# EAGLE board OR GATE (EAGLE 6.5.0)
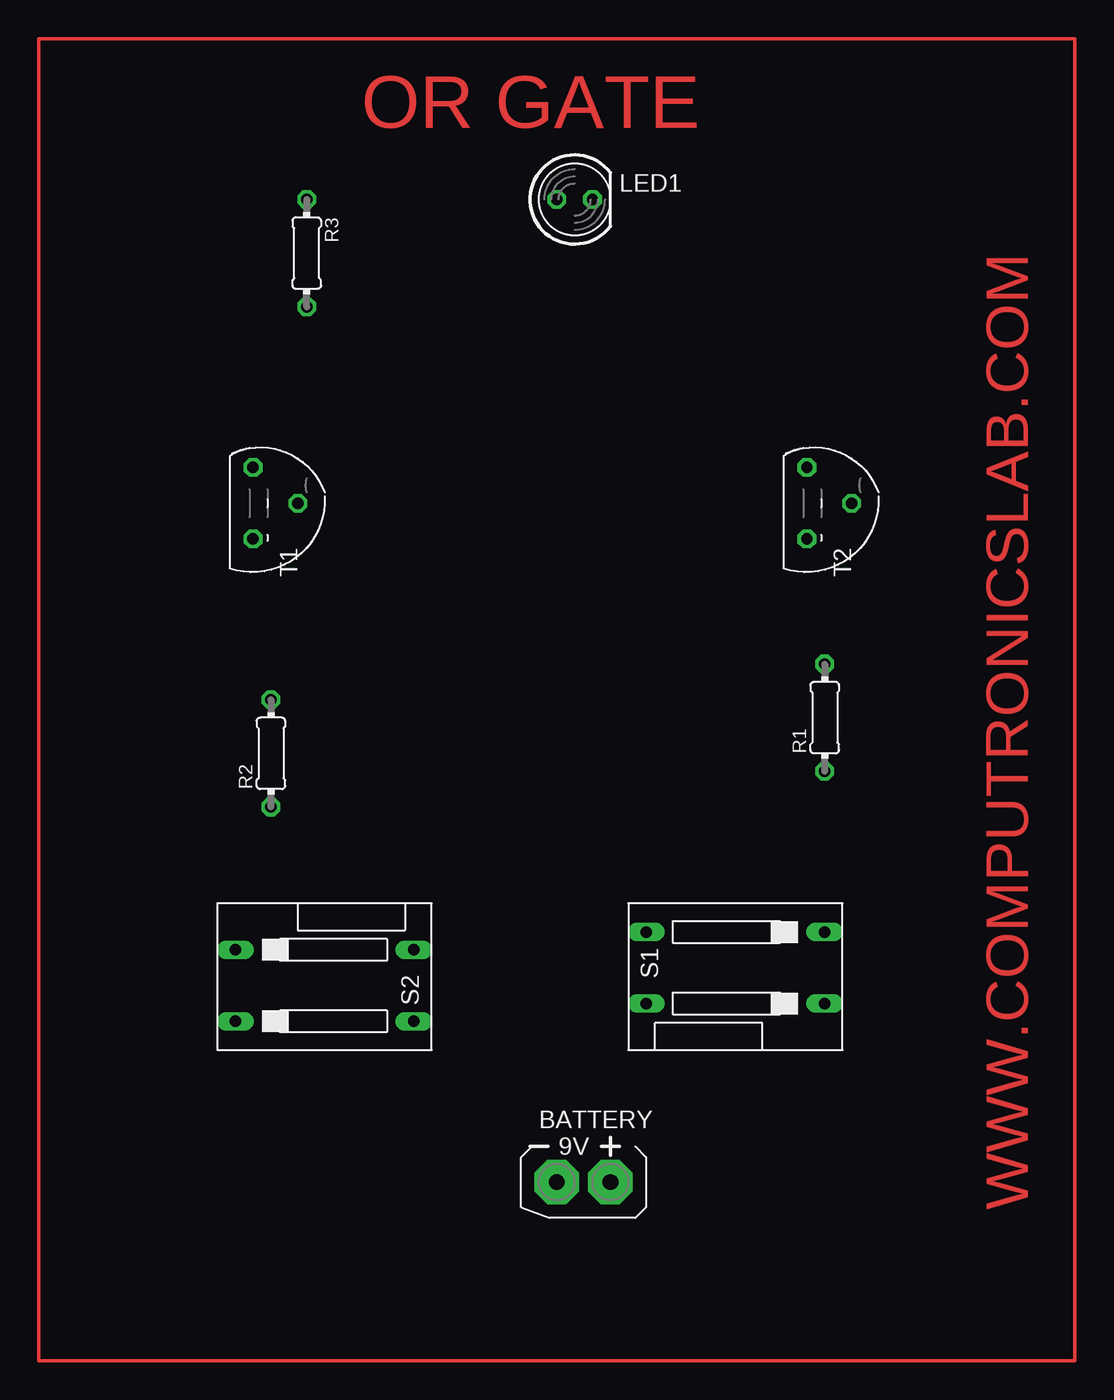
[diagram p0: board, top side]
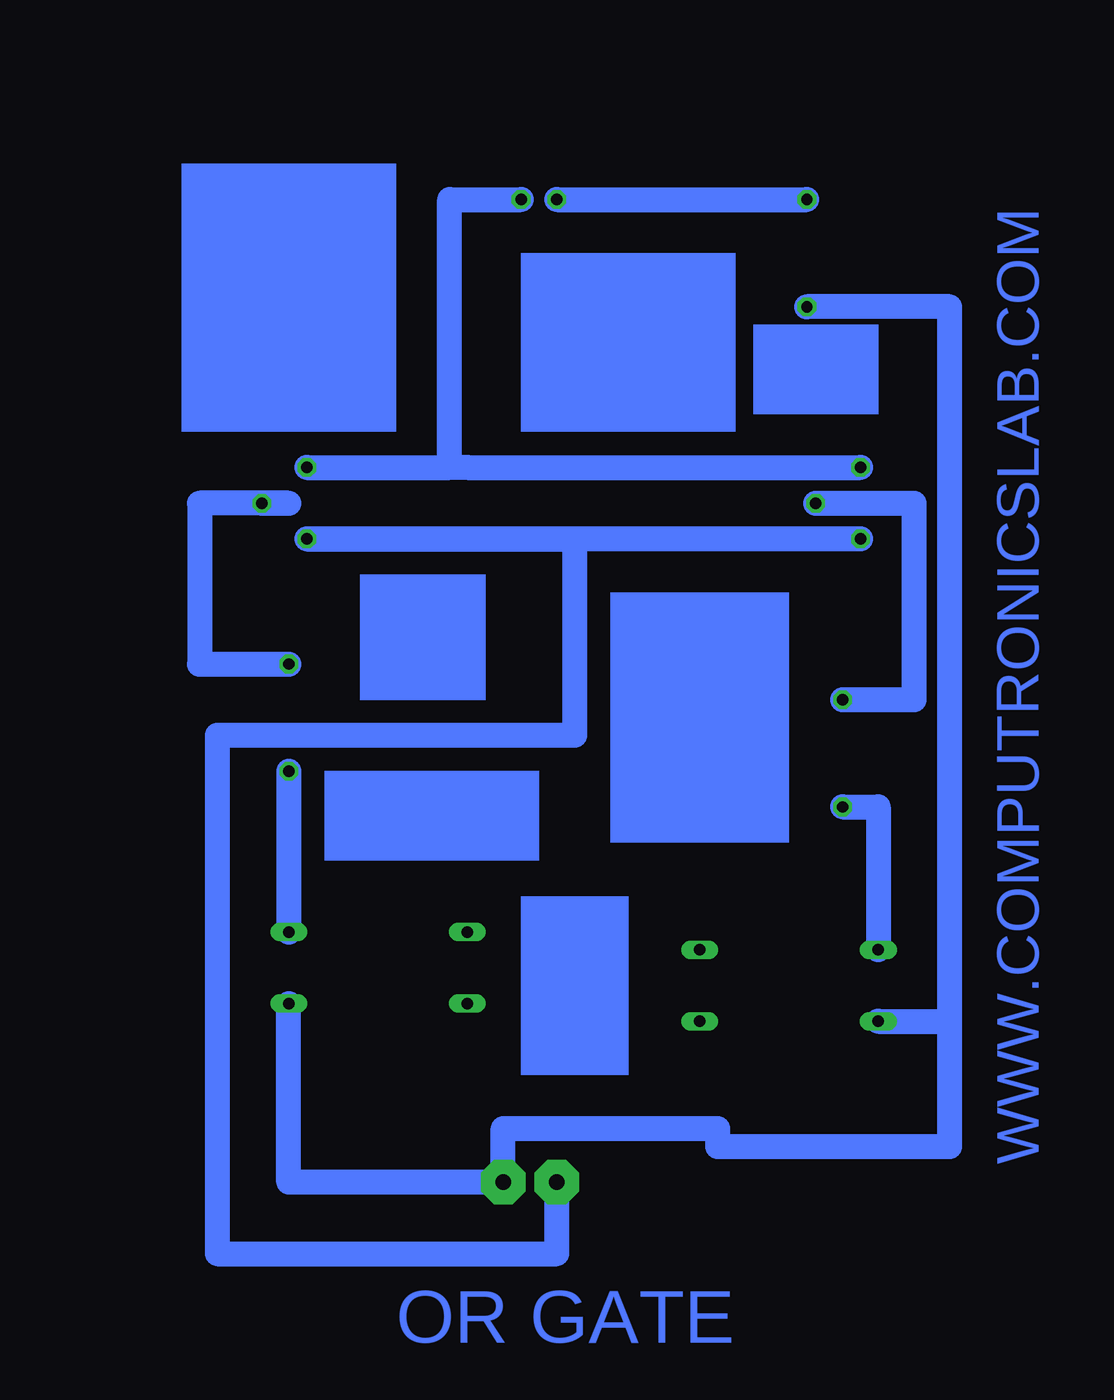
[diagram p1: board, bottom side, seen from below]

No outline drawn. Coordinates in mm, seen from the top.
Copper layers (1*16): Top 0.035mm / dielectric 1.5mm / Bottom 0.035mm
Design rules "default": minimum track width 10mil, minimum drill 24mil, track to track 8mil, track to pad 8mil, pad to pad 8mil, via to via 8mil, smd to smd 8mil, copper to edge 40mil, drill to drill 8mil, minimum pad ring 10mil, minimum via ring 8mil, stop-mask expansion 4mil, vias tented up to drill 0mil, thermal gap 10mil

## Footprints (pad centres in the part's own frame; a part is rotated, then mirrored left to right if it is on the bottom)
AB9V = drill 1.118 pad 3.15 octagon: + 0,2.54; - 0,-1.27
LED5MM = drill 0.813 octagon: A -1.27,0; K 1.27,0
0204/7 = drill 0.813 octagon: 1 -3.81,0; 2 3.81,0
DS-02 = drill 0.813 long: 1 -5.08,-6.35; 2 0,-6.35; 3 0,6.35; 4 -5.08,6.35
TO92 = drill 0.813 octagon: 1 2.54,-1.27; 2 0,1.905; 3 -2.54,-1.27

## Placement (x,y rotation side)
BATTERY  9V  [AB9V]  46.99,0 270 top
LED1  5MM  [LED5MM]  46.99,69.85 0 top
R1  10K  [0204/7]  64.77,33.02 90 top
R2  10K  [0204/7]  25.4,30.48 90 top
R3  330E  [0204/7]  27.94,66.04 270 top
S1  PUSH SWITCH  [DS-02]  58.42,17.78 90 top
S2  PUSH SWITCH  [DS-02]  29.21,11.43 270 top
T1  BC547  [TO92]  25.4,48.26 270 top
T2  BC547  [TO92]  64.77,48.26 270 top

## Library data of the parts
BATTERY = battery
LED1 = led
R1-R3 = eagle-ltspice; SPICEMODEL: NONE; SPICEPREFIX: R
S1 S2 = switch-dil; OC_FARNELL: 9472126; OC_NEWARK: unknown
T1 T2 = transistor

## Nets
N$1: LED1.K T1.3 T2.3
N$2: R1.2 T2.2
N$3: R2.2 T1.2
N$4: LED1.A R3.1
N$5: R1.1 S1.2
N$6: R2.1 S2.1
N$7: BATTERY.+ R3.2 S1.1 S2.2
N$8: BATTERY.- T1.1 T2.1
N$9: S2.3

## Tracks (layer width: path | path; a pad name or v marks a point on that pad's centre or on a via)
N$1
  Bottom 1.778: T2.3 53.34,50.8 | T1.3 52.07,50.8 53.34,50.8 | 53.34,50.8 53.34,69.85 LED1.K
N$2
  Bottom 1.778: R1.2 71.12,36.83 71.12,48.26 64.77,48.26 T2.2
N$3
  Bottom 1.778: R2.2 20.32,34.29 20.32,48.26 T1.2
N$4
  Bottom 1.778: LED1.A R3.1
N$5
  Bottom 1.778: R1.1 S1.2
N$6
  Bottom 1.778: R2.1 22.86,26.67 S2.1
N$7
  Bottom 1.778: 17.78,11.43 17.78,2.54 34.29,2.54 34.29,3.81 49.53,3.81 BATTERY.+ 64.77,0 S1.1 | R3.2 17.78,62.23 17.78,11.43 | S2.2 17.78,11.43
N$8
  Bottom 1.778: T1.1 T2.1 44.45,45.72 44.45,31.75 69.85,31.75 69.85,-5.08 45.72,-5.08 BATTERY.-
N$10
  Top 0.254: 8.89,81.28 82.55,81.28 82.55,-12.7 8.89,-12.7 8.89,81.28
(copper drawn outside any net)
  shapes: Bottom area x7

## Text on the board
Top: OR GATE | WWW.COMPUTRONICSLAB.COM
Bottom: WWW.COMPUTRONICSLAB.COM | OR GATE